# EAGLE board breadboard-carrier (EAGLE 6.5.0)

Size 256.54 x 228.6 mm. Coordinates in mm from the lower left corner, seen from the top.
Outline: 0,0 0,228.6 256.54,228.6 256.54,0 0,0
Copper layers (1+2*3+14*15+16): Top 0.04318125mm / dielectric 0.162559375mm / GND 0.035559375mm / dielectric 14mil / Power 0.035559375mm / dielectric 0.213359375mm / NS 0.035559375mm / dielectric 14mil / EW 0.035559375mm / dielectric 0.162559375mm / Bottom 0.04318125mm
Design rules "sunstone-6lyr *": minimum track width 5mil, minimum drill 8mil, track to track 5mil, track to pad 5mil, pad to pad 5mil, via to via 5mil, smd to smd 5mil, copper to edge 20mil, drill to drill 5mil, minimum pad ring 5mil, minimum via ring 5mil, stop-mask expansion 3mil, vias tented up to drill 0mil, thermal gap 6mil
Net classes: 0 default: width 0.127 mm, drill 0.203 mm, clearance 0.127 mm; 1 PWR: width 0.127 mm, drill 0.203 mm, clearance 0.127 mm to class 0, clearance 0.127 mm
Holes 3.17 mm at 91.44,139.7 91.44,88.9 53.34,139.7 53.34,88.9 12.7,121.92 12.7,106.68 10.16,10.16 246.38,10.16 246.38,218.44 10.16,218.44 127,218.44 127,10.16 147.32,203.2 154.94,203.2 170.18,203.2 177.8,203.2 193.04,203.2 200.66,203.2 215.9,203.2 223.52,203.2 147.32,177.8 154.94,177.8 170.18,177.8 177.8,177.8 193.04,177.8 200.66,177.8 215.9,177.8 223.52,177.8 149.86,50.8 157.48,50.8 172.72,50.8 180.34,50.8 195.58,50.8 203.2,50.8 218.44,50.8 226.06,50.8 149.86,25.4 157.48,25.4 172.72,25.4 180.34,25.4 195.58,25.4 203.2,25.4 218.44,25.4 226.06,25.4

## Footprints (pad centres in the part's own frame; a part is rotated, then mirrored left to right if it is on the bottom)
#4/.300-BARE+STD_NUT_OR_STAR_WASHER = hole 3.175: 0,0

## Placement (x,y rotation side)
U$1  #4-BARE_MOUNTING_HOLE/.300  [#4/.300-BARE+STD_NUT_OR_STAR_WASHER]  196.11,114.3 0 top
U$21  #4-BARE_MOUNTING_HOLE/.300  [#4/.300-BARE+STD_NUT_OR_STAR_WASHER]  135.08,83.8 0 top
U$22  #4-BARE_MOUNTING_HOLE/.300  [#4/.300-BARE+STD_NUT_OR_STAR_WASHER]  135.08,144.76 0 top
U$23  #4-BARE_MOUNTING_HOLE/.300  [#4/.300-BARE+STD_NUT_OR_STAR_WASHER]  236.7,83.8 0 top
U$24  #4-BARE_MOUNTING_HOLE/.300  [#4/.300-BARE+STD_NUT_OR_STAR_WASHER]  236.7,144.76 0 top

## Library data of the parts
U$1 U$21-U$24 = mount

## Text on the board
tDocu: PSAS RocketNet Hub | 4 | 3 | 2 | 1 | BATTERY | UMB | 6 | 7 | 8 | PSAS RocketNet Hub